# Altium PCB PCB3.PcbDoc
Units mil, origin at the board's own origin, x right, y up, seen from the top; angles counter-clockwise.
Board outline 3004 x 2225 mil, 2 copper layers (Top Layer, Bottom Layer); 15 components, 19 nets, 93 pads, 8 vias.
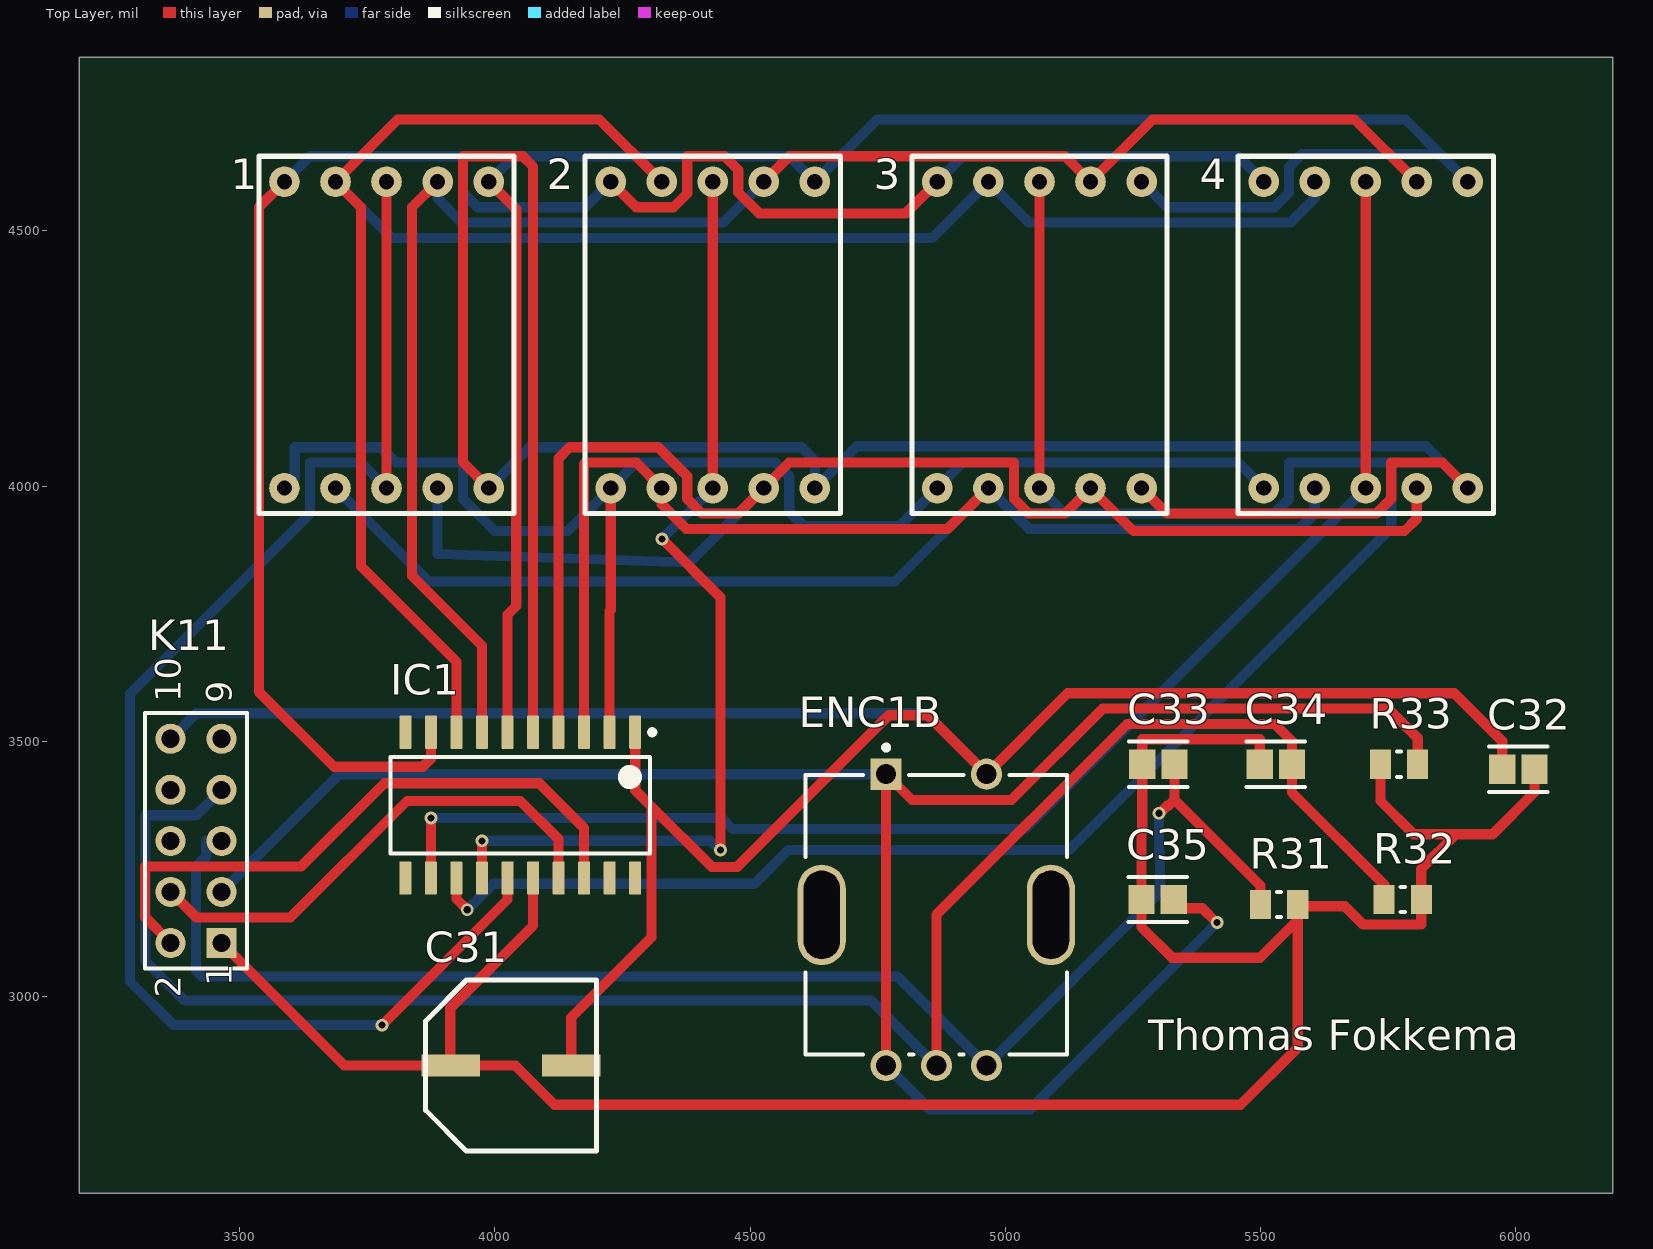
[diagram p0: Top Layer view]
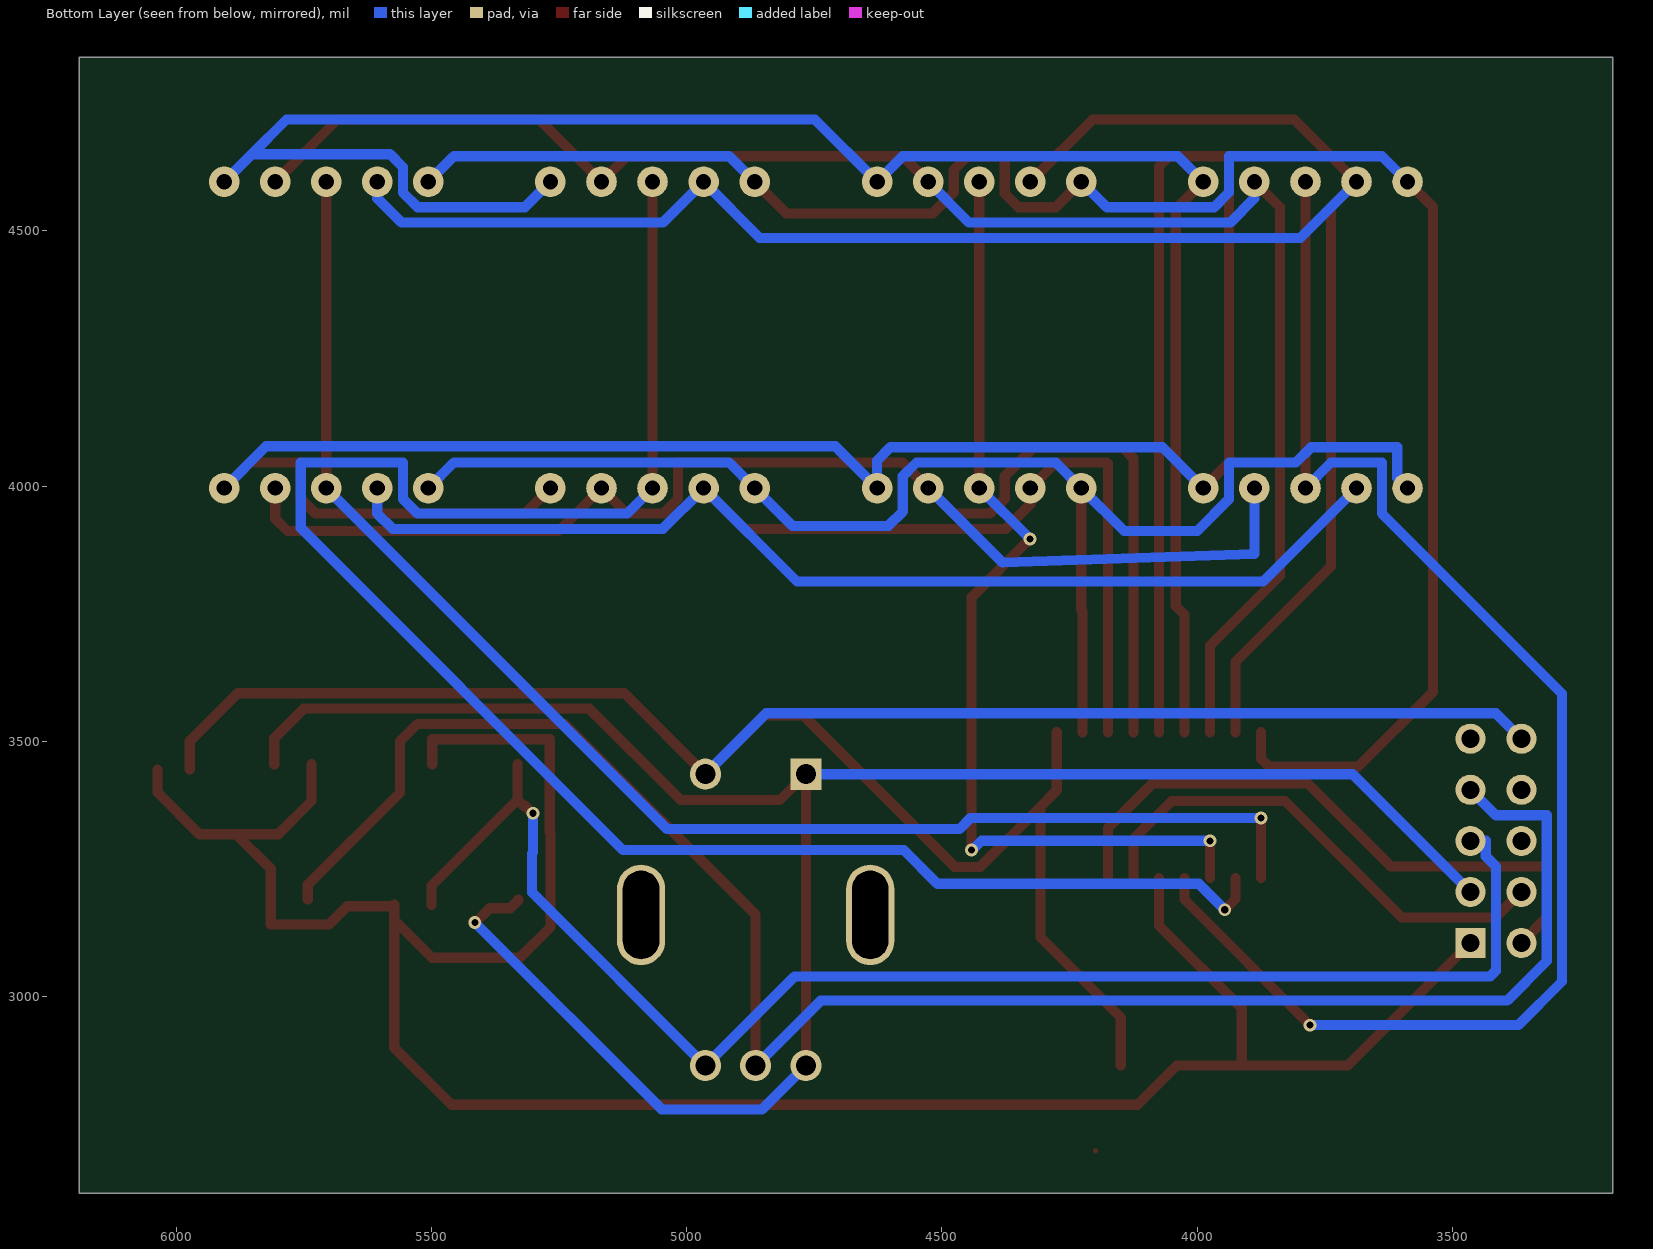
[diagram p1: Bottom Layer view, seen from below]

## Layer stack, top to bottom
Top Solder: solder mask 0.4, Solder Resist, Dk 3.5
Top Layer: signal copper 1.4
Dielectric 1: dielectric 12.6, FR-4, Dk 4.8
Bottom Layer: signal copper 1.4
Bottom Solder: solder mask 0.4, Solder Resist, Dk 3.5

## Board outline
3186,2615 6190,2615 6190,4840 3186,4840

## Design rules (kind name [scope] priority, off if disabled: settings)
Clearance [All] p1: gap=10 ignorepadtopadclearanceinfootprint=FALSE except(0: Arc-Hole Track-Hole SMDPad-Hole THPad-Hole Via-Hole Fill-Hole Poly-Hole Region-Hole Text-Hole)
PolygonConnect [All] p1: connectstyle=Relief reliefconductorwidth=10 reliefentries=4 polygonreliefangle="90 Angle" airgapwidth=10
RoutingVias [All] p1: holewidth=14 width=25 viastyle="Through Hole" minholewidth=14 minwidth=25 maxholewidth=28 maxwidth=50
SilkToSilkClearance [All] p1: silktosilkclearance=8
SilkToSolderMaskClearance [IsText] p1: minsilkscreentomaskgap=8 clearancetoexposedcopper=TRUE
SolderMaskExpansion [All] p1: expansion=4 istentingtop=FALSE
Width [All] p1: maxlimit=20 minlimit=20 preferedwidth=20
28 further rules are at their usual default settings.

## Components (designator, comment, footprint, x,y, rotation, side; value= is the part's Value field where it differs from the comment)
1 "Segment" Segement 3588,3996 r0 top
2 "Segment" Segement 4227,3996 r0 top
3 "Segment" Segement 4867,3996 r0 top
4 "Segment" Segement 5506,3996 r0 top
C31 "100µ 50V" CE_D8_L10 4031.89,2865 r180 top
C32 "100n" CC_0805_L 6005,3445 r180 top value="0.22 μF"
C33 "10n" CC_0805_L 5300,3455 r0 top value="0.22 μF"
C34 "10n" CC_0805_L 5530,3455 r0 top value="0.22 μF"
C35 "10n" CC_0805_L 5298.47,3190 r0 top value="0.22 μF"
ENC1B "ROTARY_ENCODER" PEC11R_4220F_S0012 4865,3160 r0 top
IC1 "TM1637" SOP_20_M 4050,3375 r270 top
K11 "Header 5X2" HDR2X5 3465,3105 r90 top
R31 "10kΩ" R_0805_M 5536.42,3180 r0 top
R32 "10kΩ" R_0805_M 5778.58,3190 r0 top
R33 "10kΩ" R_0805_M 5771.42,3455 r180 top

## Footprints (in the part's own frame and the unit in brackets; to place one, negate y for a bottom-side part, rotate by r counter-clockwise, add the part's x,y. Pads: shape width x height; smd on the part's side, far side on the other; paste and mask are expansions set on the pad)
CC_0805_L [mil]
  rect 51.36x57.33 smd paste+0 mask+0: 1(-31.53,0) 2(31.53,0)
  silkscreen extent -57,-44 57,44, body extent -67,-39 67,39, height 10
CE_D8_L10 [mm]
  rect 2.9x1.1 smd: 1(-3,0) 2(3,0)
  Top Layer lines w0.254: -4.25,4.241 -4.259,4.25
  silkscreen extent -4.26,-4.25 4.25,4.25
HDR2X5 [mm] "Connector; Header; 5x2 Position"
  rect 1.5x1.5 hole 0.9: 1(0,0)
  round 1.5 hole 0.9: 2(0,2.54) 3(2.54,0) 4(2.54,2.54) 5(5.08,0) 6(5.08,2.54) 7(7.62,0) 8(7.62,2.54) 9(10.16,0) 10(10.16,2.54)
  silkscreen extent -1.27,-1.27 11.43,3.81
PEC11R_4220F_S0012 [mm]
  rect 1.55x1.55 hole 1 paste-1000 mask+0: 1(-2.5,7)
  round 1.55 hole 1 paste-1000 mask+0: 2(2.5,7) A(-2.5,-7.5) B(2.5,-7.5) C(0,-7.5)
  rrect100% 2.4x5 hole 4.4 slot 1.8 at 0 deg paste-1000 mask+0: 3(-5.7,0) 4(5.7,0)
  silkscreen extent -6.5,-6.95 6.5,8.45, body extent -7,-8.37 7,7.88, height 0.25
R_0805_M [mm] "Chip Resistor, 2-Leads, Body 2.00x1.25mm, IPC Medium Density"
  rect 1.05x1.45 smd: 1(-0.925,0) 2(0.925,0)
  silkscreen extent -0.1,-0.62 0.1,0.62, body extent -1.1,-0.72 1.1,0.72, height 0.5
Segement [mil]
  round 60 hole 30: 1(0,0) 2(100,0) 3(200,0) 4(300,0) 5(400,0) 6(400,600) 7(300,600) 8(200,600) 9(100,600) 10(0,600)
  silkscreen extent -50,-50 450,650
SOP_20_M [mm] "SOIC,20-Leads,Body 12.9x5.6mm,Pitch 1.27mm,IPC Medium Density"
  rrect17% 1.65x0.6 smd: 1(-3.625,5.715) 2(-3.625,4.445) 3(-3.625,3.175) 4(-3.625,1.905) 5(-3.625,0.635) 6(-3.625,-0.635) 7(-3.625,-1.905) 8(-3.625,-3.175) 9(-3.625,-4.445) 10(-3.625,-5.715) 11(3.625,-5.715) 12(3.625,-4.445) 13(3.625,-3.175) 14(3.625,-1.905) 15(3.625,-0.635) 16(3.625,0.635) 17(3.625,1.905) 18(3.625,3.175) 19(3.625,4.445) 20(3.625,5.715)
  silkscreen extent -3.75,-6.45 2.4,6.69, body extent -2.8,-6.45 2.8,6.45, height 2

## Part data
C31: library part Capacitor_Electrolytic, Manufacturer=Panasonic, Max Operating Temperature="105 degC", Min Operating Temperature="-55 degC", Package Quantity=500, Voltage Rating="25 V", ComponentLink1Description="Manufacturer URL", ComponentLink1URL=http://www.panasonic.com/, ComponentLink2Description=Datasheet, ComponentLink2URL=http://industrial.panasonic.com/cdbs/www-data/pdf/RDE0000/ABA0000C1181.pdf, DatasheetVersion=03/2016, Height="10.2 mm", Lead Pitch="3.1 mm", Length="10.2 mm", Mount="Surface Mount", Mounting Technology="Surface Mount", PackageDescription="2-Pin Electrolytic Aluminum Capacitor, Body 8.3 x 8.3 mm", PackageReference=EEE-FK1E221P, Packaging="Tape and Reel", Pins=2, REACH SVHC="No SVHC", RoHSCompliant=true
C32 C33 C34 C35: library part Capacitor_Ceramic, Capacitance="0.22 μF", Manufacturer=KEMET, Manufacturer Part Number=C0805C224K5RACTU, Package=C0805C-DN, Temperature="-55°C to +125°C", Temperature Characteristic=X7R, Temperature Coefficient=30ppm/°C, Temperature Range High=+125°C, Temperature Range Low=-55°C, Tolerance=0.1, Voltage Rating="50 V", Automotive=No, Category=Cap, ComponentLink2Description=Datasheet, ComponentLink2URL=https://content.kemet.com/datasheets/KEM_C1003_C0G_SMD.pdf, Device Class L1="Passive Components", Device Class L2=Capacitors, Device Class L3="Ceramic Capacitors", Digikey Description="CAP CER 0.22UF 50V X7R 0805", Height=0.88mm, Ipc Land Pattern Name=CAPC200125X78, Lead Free=Yes, Material=Ceramic, Mouser Description="CAP CER 0.22UF 50V X7R 0805", Octopart=https://octopart.com/c0805c224k5ractu-kemet-144670, RoHS=TRUE
ENC1B: Current Rating=10mA, Manufacturer=Bourns, Manufacturer Part Number=PEC11R-4015F-N0024, Package=0, Temperature="-30°C to +70°C", Temperature Range High=+70°C, Temperature Range Low=-30°C, Voltage Rating Dc=5V, Automotive=No, Category=Enc, ComponentLink2Description=Datasheet, ComponentLink2URL=https://www.bourns.com/docs/product-datasheets/pec11r.pdf?sfvrsn=bb617cbf_7, Conn Orientation=Vertical, Detent=No, Device Class L1=Electromechanical, Device Class L2=Switches, Device Class L3=Encoders, Digikey Description="ROTARY ENCODER MECHANICAL 24PPR", Encoder Type=Incremental, Height=22.3mm, Lead Free=Yes, Mouser Description="Encoders 15mm SHAFT NO SWITCH", Number Of Circuits=1, Octopart=https://octopart.com/pec11r-4015f-n0024-bourns-26648251, Pulses Per Rev=24, RoHS=TRUE
IC1: "LED Drive Control Special Circuit", Package=Package, Availability="Not in stock", Check_prices=https://www.snapeda.com/parts/TM1637/Titan+Micro+Electronics/view-part/?ref=eda, MF="Titan Micro Electronics", MP=TM1637, Price=None, SnapEDA_Link=https://www.snapeda.com/parts/TM1637/Titan+Micro+Electronics/view-part/?ref=snap
K11: "Header, 5-Pin, Dual row", LatestRevisionDate=17-Jul-2002, LatestRevisionNote="Re-released for DXP Platform.", Publisher="Altium Limited"
R31 R32 R33: library part Resistor, Manufacturer="Vishay Dale", Part Number=CRCW08050000Z0EA

## Via types
v1: diameter 25, hole 14, Top Layer to Bottom Layer, 8 vias

## Nets (pads, with @x,y where several pads share a name; then routed paths per layer and width w, separated by ;. In a path a pad name is that pad's centre, name@x,y a point inside that pad or via, vN(x,y) a via of type N, cw(c..) or ccw(c..) an arc to the next point about the centre after c; other vN are vias at no path point)
+5: C31.2 C32.1 C33.1 C34.1 C35.1 IC1.16 K11.1 R31.2 R32.2 R33.2 | length 4950.6
  Top Layer w20: K11.1 3705,2865 C31.2@3913,2865 ; IC1.16 4075,3139 3913,2977 C31.2@3913,2865 ; C34.1 5498.47,3504 5268.47,3504 C33.1 5268.47,3322.53 5266.95,3321 C35.1 5266.95,3136.05 5327,3076 5498.84,3076 5572.84,3150 ; R31.2 R31.2@5572.84,3177 ; R33.2 5735,3383 5800,3318 5883,3318 ; C32.1 6036.53,3400 5954.53,3318 5883,3318 ; C31.2@3913,2865 C31.2 4040,2865 4117,2788 5460.84,2788 5572.84,2900 5572.84,3150 ; 5572.84,3150 R31.2@5572.84,3177 ; R31.2@5572.84,3177 5665,3177 5701,3141 5815,3141 R32.2 5815,3250 5883,3318
GND: C31.1 C32.2 ENC1B.2 IC1.1 K11.10 | length 4445.3
  Top Layer w20: C31.1 4150,2959 4307,3116 4307,3372 ; IC1.1 4275,3404 4307,3372 ; C32.2 5973.47,3500 5879.47,3594 5121.84,3594 ENC1B.2 4848.02,3551 4772,3551 4475,3254 4425,3254 4307,3372
  Bottom Layer w20: K11.10 3415,3555 4844.02,3555 ENC1B.2
Net1_1: 1.1 2.1 3.1 4.1 IC1.2 | length 2794.9
  Top Layer w20: IC1.2 4225,3755 4227,3757 2.1
  Bottom Layer w20: 1.1 3608,4016 3608,4076 3776.94,4076 3806.94,4046 3938,4046 3938,3974 4000,3912 4143,3912 2.1 4277,4046 4550,4046 4577,4019 4577,3950 4605,3922 4793,3922 3.1 4917,4046 5456,4046 4.1
Net1_2: 1.2 2.2 3.2 4.2 IC1.3 | length 3590
  Top Layer w20: IC1.3 4175,4044 4177,4046 4277,4046 2.2 4327,3964 4375,3916 4887,3916 3.2
  Bottom Layer w20: 1.2 3871,3813 4784,3813 3.2 5047,3916 5576,3916 5606,3946 4.2
Net1_3: 1.3 1.8 IC1.15 | length 2852.3
  Top Layer w20: v1(3779,2944) 4025,3190 IC1.15 ; 1.3 1.8
  Bottom Layer w20: v1(3779,2944) 3371,2944 3285.47,3029.53 3285.47,3593.47 3638,3946 3638,4046 3738,4046 1.3
Net1_4: 1.4 2.4 3.4 4.4 IC1.4 | length 3385
  Top Layer w20: IC1.4 4125,4054.64 4146.36,4076 4320,4076 4377,4019 4377,3975 4406,3946 4477,3946 2.4 4577,4046 5017,4046 5017,3975 5046,3946 5117,3946 3.4 5251,3912 5782,3912 5806,3936 4.4
  Bottom Layer w20: 1.4 3888,3867 4381,3850 2.4
Net1_5: 1.5 2.5 3.5 4.5 IC1.5 | length 4771.6
  Top Layer w20: 1.5 3938,4046 3938,4646 4055,4646 4075,4626 IC1.5 ; 3.5 5317,3946 5727,3946 5756,3975 5756,4046 5856,4046 4.5
  Bottom Layer w20: 1.5 4068,4076 4601,4076 4627,4050 2.5 4709,4078 5824,4078 4.5
Net1_6: 1.6 2.6 3.6 4.6 IC1.6 | length 3846.3
  Top Layer w20: 1.6 4042,4542 4042,3765 4025,3748 IC1.6
  Bottom Layer w20: 1.6 4038,4646 4577,4646 2.6 4749,4718 5784,4718 5852,4650 ; 3.6 5317,4546 5527,4546 5556,4575 5556,4625 5581,4650 5852,4650 ; 4.6 5852,4650
Net1_7: 1.7 2.7 3.7 4.7 IC1.7 | length 3301.6
  Top Layer w20: 1.7 3838,4546 3838,3824 3975,3687 IC1.7 ; 2.7 4577,4646 5117,4646 3.7 5289,4718 5684,4718 4.7
  Bottom Layer w20: 1.7 3888,4563.44 3935.44,4516 4447,4516 2.7
Net1_9: 1.9 2.9 3.9 4.9 IC1.8 | length 4011
  Top Layer w20: IC1.8 3925,3656 3738,3843 3738,4546 1.9 3810,4718 4205,4718 2.9
  Bottom Layer w20: 1.9 3798,4486 4857,4486 3.9 5047,4516 5558.56,4516 5606,4563.44 4.9
Net1_10: 1.10 2.10 3.10 4.10 IC1.9 | length 3762.5
  Top Layer w20: 1.10 3538,4546 3538,3597 3685,3450 3859,3450 3875,3466 IC1.9 ; 2.10 4277,4546 4350,4546 4377,4573 4377,4646 4450,4646 4477,4619 4477,4575 4518,4534 4805,4534 3.10
  Bottom Layer w20: 1.10 3638,4646 3938,4646 3938,4575 3967,4546 4177,4546 2.10 ; 3.10 4917,4646 5456,4646 4.10
Net2_3: 2.3 2.8 IC1.14 | length 1944.8
  Top Layer w20: IC1.14 v1(3975,3305) ; v1(4327.5,3896.5) 4442,3782 v1(4442,3287) ; 2.3 2.8
  Bottom Layer w20: v1(3975,3305) 4422.65,3305 4440.65,3287 v1(4442,3287) ; v1(4327.5,3896.5) 2.3
Net3_3: 3.3 3.8 IC1.13 | length 3711.5
  Top Layer w20: IC1.13 3925,3191 v1(3946,3170) ; 3.3 3.8
  Bottom Layer w20: v1(3946,3170) 3997,3221 4509,3221 4575,3287 5125,3287 5756,3918 5756,4046 5556,4046 5556,3975 5527,3946 5117,3946 3.3
Net4_3: 4.3 4.8 IC1.12 | length 2834.5
  Top Layer w20: IC1.12 v1(3875,3350) ; 4.3 4.8
  Bottom Layer w20: v1(3875,3350) 4443.68,3350 4465.68,3328 5038,3328 4.3
NetC33_2: C33.2 ENC1B.B K11.5 R31.1 | length 2940.1
  Top Layer w20: v1(5301,3359) 5302.35,3359 5317.11,3373.76 5319.81,3373.76 5331.53,3385.47 ; C33.2 5331.53,3385.47 ; R31.1 5500,3217 5331.53,3385.47
  Bottom Layer w20: K11.5 3435,3305 3435,3275 3415,3255 3415,3050.72 3426.72,3039 4789.15,3039 ENC1B.B 5303,3204.3 5303,3279.97 5301,3281.97 v1(5301,3359)
NetC34_2: C34.2 ENC1B.C K11.7 R32.1 | length 3635.7
  Top Layer w20: ENC1B.C 4865,3160 5239,3534 5527.53,3534 5561.53,3500 C34.2 5561.53,3399.47 5742.16,3218.84 R32.1
  Bottom Layer w20: K11.7 3415,3355 3315.47,3355 3315.47,3069.53 3393,2992 4737.72,2992 ENC1B.C
NetC35_2: C35.2 ENC1B.1 ENC1B.A K11.3 R33.1 | length 4119.4
  Top Layer w20: ENC1B.A ENC1B.1 4817.16,3385 5012,3385 5191,3564 5750,3564 5807.84,3506.16 R33.1 ; C35.2 5330,3188.65 5345.68,3172.97 5385.68,3172.97 5413.65,3145 v1(5415,3145)
  Bottom Layer w20: K11.3 3695.59,3435.59 ENC1B.1 ; ENC1B.A 4852.3,2779 5049,2779 v1(5415,3145)
NetIC1_17: IC1.17 K11.4 | length 981.9
  Top Layer w20: K11.4 3415,3155 3600,3155 3828,3383 4050,3383 4125,3308 IC1.17
NetIC1_18: IC1.18 K11.2 | length 1232.4
  Top Layer w20: K11.2 3315,3155 3315,3255 3621,3255 3784,3418 4087,3418 4175,3330 IC1.18
pads on no net: ENC1B.3 ENC1B.4 IC1.10 IC1.11 IC1.19 IC1.20 K11.6 K11.8 K11.9

## Silkscreen, mask and mechanical layers (free items; w line width, h text height)
Top Overlay:
  text "Thomas Fokkema" at 5280,2895 h60

## Text inside footprints (layer, text, board x,y; h text height)
K11: Top Overlay "2" at 3385,2998 h50 r90; Top Overlay "1" at 3485,3020 h50 r90; Top Overlay "9" at 3485,3575 h50 r90; Top Overlay "10" at 3385,3576 h50 r90